# Altium PCB AT89S52单片机入门与提高.PcbDoc (part 2 of 4)
Units mm, origin at the board's own origin, x right, y up, seen from the top; angles counter-clockwise.
Board outline 152.4 x 101.6 mm, 2 copper layers (Top Layer, Bottom Layer); 111 components, 112 nets, 451 pads, 53 vias.
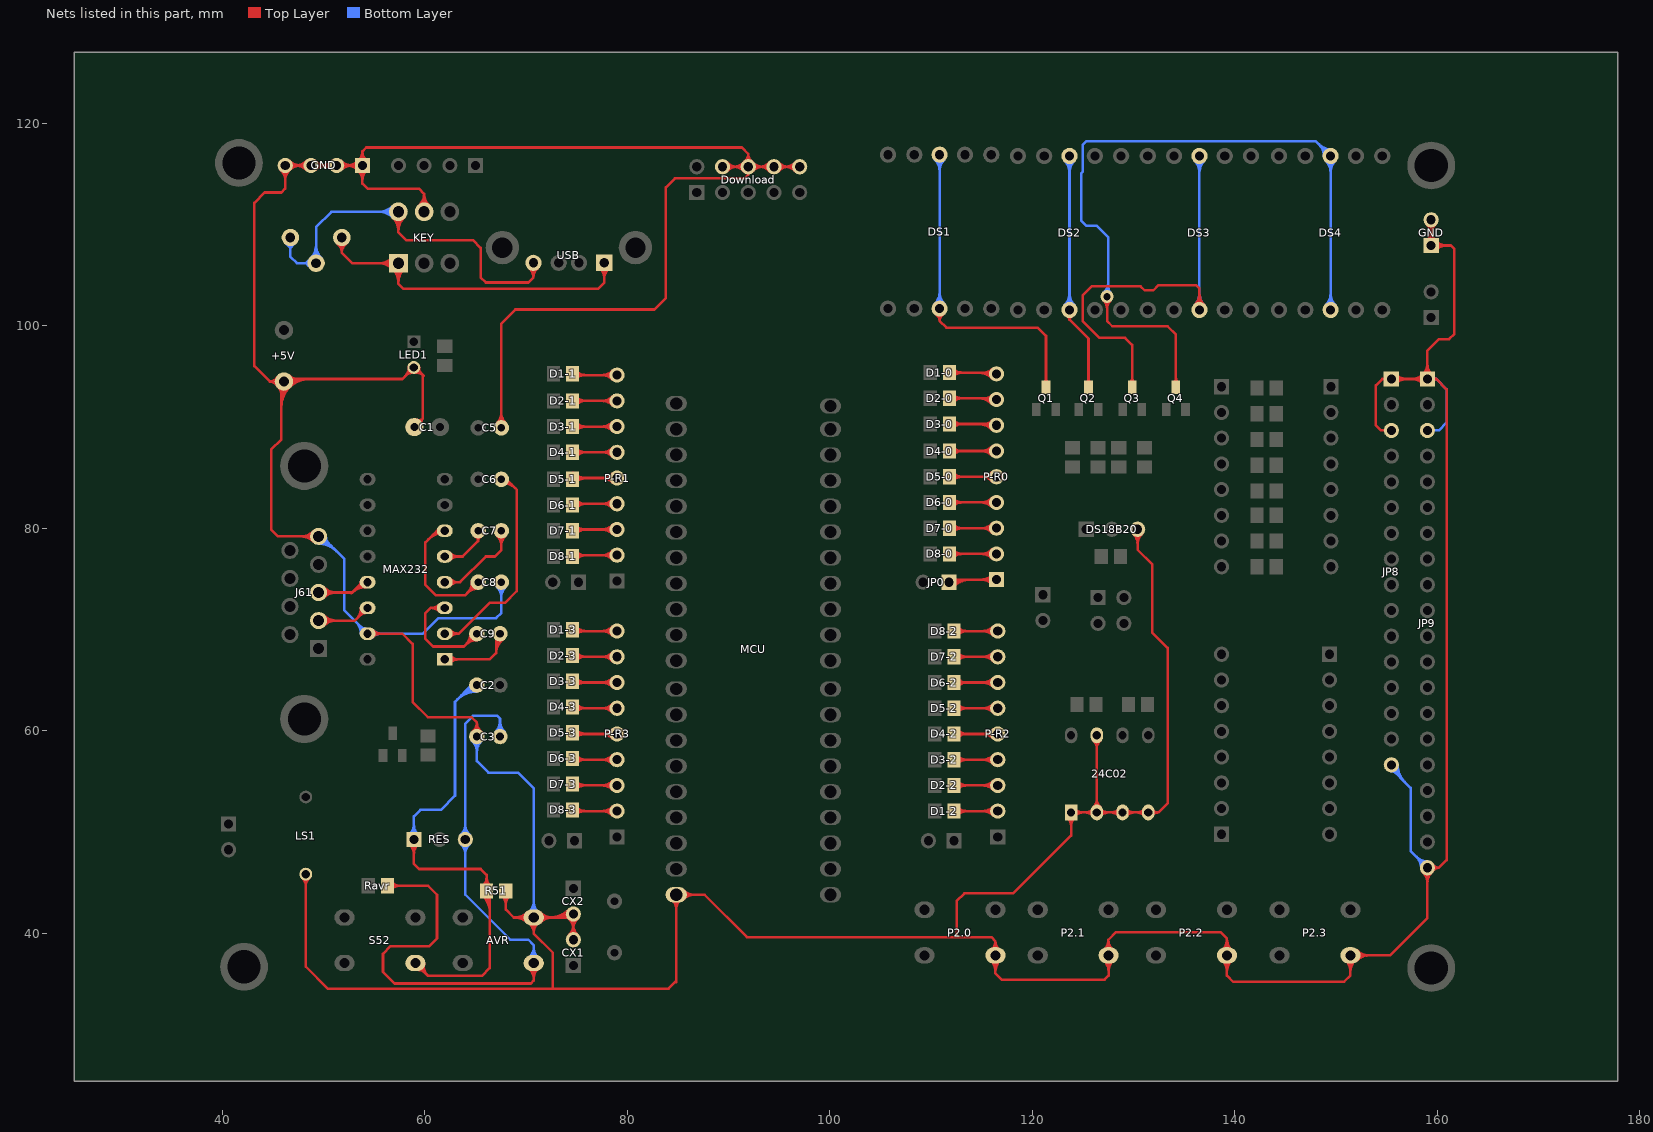
[diagram p2: the nets of this part, all layers, seen from the top]

## Via types
v1: diameter 1.27, hole 0.711, Top Layer to Bottom Layer, 53 vias

## Nets (pads, with @x,y where several pads share a name; then routed paths per layer and width w, separated by ;. In a path a pad name is that pad's centre, name@x,y a point inside that pad or via, vN(x,y) a via of type N, cw(c..) or ccw(c..) an arc to the next point about the centre after c; other vN are vias at no path point) (continued)
GND: 24C02.1 24C02.2 24C02.3 24C02.4 24C02.7 +5V.2@46.101,94.488 AVR.2 C1.2 C3.2 C5.2 C8.1 CX1.2 CX2.2 Download.4 Download.6 Download.8 Download.10 DS18B20.3 GND.1 GND.2 GND.3 GND.4 J61.5 JP8.1 JP8.3 JP8.16 JP9.1 JP9.3 JP9.20 KEY.3 LED1.2 LS1.2 MAX232.15 MCU.20 P2.0.1@116.355,37.831 P2.1.1 P2.2.1 P2.3.1 R51.2 | length 834.9
  Top Layer w0.254: +5V.2@45.43,94.08 ccw(c44.704,93.638) 44.704,94.488 ; +5V.2@45.43,94.896 cw(c44.704,95.338) 44.704,94.488 ; +5V.2@45.546,93.933 cw(c44.819,93.206) 45.847,93.206 cw(c47.383,93.206) 46.297,94.292 cw(c47.383,93.206) 47.383,94.742 cw(c47.383,95.77) +5V.2@46.656,95.043 ; +5V.2@45.647,94.212 ccw(c45.156,93.913) 45.156,94.488 ccw(c45.156,95.063) +5V.2@45.647,94.764 ; GND.4@45.787,115.383 cw(c44.724,114.32) 46.228,114.32 cw(c47.732,114.32) 46.669,115.383 cw(c47.732,114.32) 47.732,115.824 cw(c47.732,117.328) GND.4@46.669,116.265 ; 45.847,91.98 cw(c48.609,91.98) 46.656,93.933 cw(c48.609,91.98) 48.609,94.742 ; 45.847,92.593 cw(c47.996,92.593) 46.476,94.113 cw(c47.996,92.593) 47.996,94.742 ; GND.4@45.967,115.563 cw(c45.337,114.933) 46.228,114.933 cw(c47.119,114.933) 46.489,115.563 cw(c47.119,114.933) 47.119,115.824 cw(c47.119,116.715) GND.4@46.489,116.085 ; +5V.2@46.101,94.742 57.785,94.742 LED1.2@58.928,95.885 59.055,95.885 59.817,95.123 59.817,90.83 ; LS1.2@47.901,45.488 cw(c47.034,44.621) 48.26,44.621 cw(c49.486,44.621) LS1.2@48.619,45.488 ; LS1.2@48.26,45.847 48.26,36.703 50.419,34.544 84.074,34.544 84.836,35.306 ; GND.3@48.327,115.383 ccw(c47.264,114.32) 47.264,115.824 ccw(c47.264,117.328) GND.3@48.327,116.265 ; GND.3@48.507,115.563 ccw(c47.877,114.933) 47.877,115.824 ccw(c47.877,116.715) GND.3@48.507,116.085 ; J61.5@49.02,78.692 ccw(c47.795,77.467) 47.795,79.2 ccw(c47.795,80.933) J61.5@49.02,79.708 ; GND.3@49.029,115.563 cw(c49.659,114.933) 49.659,115.824 cw(c49.659,116.715) GND.3@49.029,116.085 ; J61.5@49.2,78.872 ccw(c48.408,78.08) 48.408,79.2 ccw(c48.408,80.32) J61.5@49.2,79.528 ; GND.3@49.209,115.383 cw(c50.272,114.32) 50.272,115.824 cw(c50.272,117.328) GND.3@49.209,116.265 ; J61.5@49.528,79.2 45.514,79.2 44.831,79.883 44.831,87.757 45.847,88.773 45.847,94.234 +5V.2@46.101,94.488 44.704,94.488 ; GND.2@50.867,115.383 ccw(c49.804,114.32) 49.804,115.824 ccw(c49.804,117.328) GND.2@50.867,116.265 ; GND.2@51.047,115.563 ccw(c50.417,114.933) 50.417,115.824 ccw(c50.417,116.715) GND.2@51.047,116.085 ; GND.2@51.569,115.563 cw(c52.199,114.933) 52.199,115.824 cw(c52.199,116.715) GND.2@51.569,116.085 ; GND.2@51.749,115.383 cw(c52.812,114.32) 52.812,115.824 cw(c52.812,117.328) GND.2@51.749,116.265 ; GND.1@53.407,116.265 cw(c52.344,117.328) 52.344,115.824 cw(c52.344,114.32) 53.407,115.383 cw(c52.344,114.32) 53.848,114.32 cw(c55.352,114.32) GND.1@54.289,115.383 ; GND.1@53.432,116.288 ccw(c52.593,117.221) 53.848,117.221 ; GND.1@53.587,116.085 cw(c52.957,116.715) 52.957,115.824 cw(c52.957,114.933) 53.587,115.563 cw(c52.957,114.933) 53.848,114.933 cw(c54.739,114.933) GND.1@54.109,115.563 ; GND.1@53.601,116.099 ccw(c53.105,116.651) 53.848,116.651 ccw(c54.591,116.651) GND.1@54.095,116.099 ; GND.1@53.848,115.824 GND.4@46.228,115.824 46.228,113.538 45.847,113.157 44.196,113.157 43.18,112.141 43.18,96.012 44.704,94.488 ; GND.1@54.264,116.288 cw(c55.103,117.221) 53.848,117.221 ; MAX232.15@54.36,69.597 57.784,69.597 58.801,68.58 58.801,62.865 60.325,61.341 64.643,61.341 65.151,60.833 ; MAX232.15@54.874,69.245 cw(c55.724,68.395) 55.724,69.597 cw(c55.724,70.799) MAX232.15@54.874,69.949 ; LED1.2@58.42,95.885 cw(c57.194,95.885) 58.061,95.018 cw(c58.928,94.151) LED1.2@58.928,95.377 ; LED1.2@58.954,95.632 cw(c59.023,94.958) 59.503,95.437 ; C1.2@58.979,89.992 59.817,90.83 ; LED1.2@58.98,95.38 cw(c59.094,94.273) 59.88,95.06 ; C1.2@59.259,90.713 ccw(c59.448,91.2) 59.817,90.83 ; KEY.3@59.414,111.848 ccw(c58.362,113.03) 59.944,113.03 ; LED1.2@59.436,95.885 ccw(c60.356,95.885) 59.705,95.235 ; KEY.3@59.582,111.658 ccw(c58.866,112.464) 59.944,112.464 ccw(c61.022,112.464) KEY.3@60.306,111.658 ; C1.2@59.699,90.272 cw(c60.186,90.461) 59.817,90.83 ; KEY.3@59.944,111.252 59.944,113.03 ; KEY.3@60.474,111.848 cw(c61.526,113.03) 59.944,113.03 ; C3.2@64.733,59.914 ccw(c63.932,60.833) 65.151,60.833 ; C3.2@64.9,59.723 ccw(c64.42,60.274) 65.151,60.274 ccw(c65.882,60.274) C3.2@65.402,59.723 ; C3.2@65.151,59.436 65.151,60.833 ; C3.2@65.569,59.914 cw(c66.37,60.833) 65.151,60.833 ; C5.2@67.115,90.365 ccw(c66.031,91.449) 67.564,91.449 ccw(c69.097,91.449) C5.2@68.013,90.365 ; C5.2@67.295,90.185 ccw(c66.644,90.836) 67.564,90.836 ccw(c68.484,90.836) C5.2@67.833,90.185 ; C5.2@67.564,89.916 67.564,100.203 68.961,101.6 82.677,101.6 83.82,102.743 83.82,113.665 84.709,114.554 91.567,114.554 91.948,114.935 ; R51.2@67.636,43.726 cw(c66.743,42.833) 68.006,42.833 cw(c69.269,42.833) R51.2@68.376,43.726 ; R51.2@68.006,44.196 68.006,42.357 68.794,41.569 74.335,41.569 CX2.2@74.676,41.91 CX1.2@74.676,39.37 ; AVR.2@70.086,41.093 ccw(c68.937,39.944) 68.937,41.569 ccw(c68.937,43.194) AVR.2@70.086,42.045 ; AVR.2@70.266,41.273 ccw(c69.55,40.558) 69.55,41.569 ccw(c69.55,42.581) AVR.2@70.266,41.865 ; AVR.2@70.294,41.085 cw(c69.227,39.982) 70.762,39.982 ; AVR.2@70.471,41.268 cw(c69.806,40.581) 70.762,40.581 cw(c71.718,40.581) AVR.2@71.053,41.268 ; AVR.2@70.762,41.569 70.762,39.982 ; AVR.2@71.23,41.085 ccw(c72.297,39.982) 70.762,39.982 ; AVR.2@71.258,41.273 cw(c71.974,40.558) 71.974,41.569 cw(c71.974,42.581) AVR.2@71.258,41.865 ; AVR.2@71.438,41.093 cw(c72.587,39.944) 72.587,41.569 cw(c72.587,43.194) AVR.2@71.438,42.045 ; 72.349,41.569 ccw(c72.349,44.237) CX2.2@74.235,42.351 ; 72.644,34.544 72.644,38.1 70.762,39.982 ; 72.962,41.569 ccw(c72.962,43.624) CX2.2@74.415,42.171 ; 73.576,41.569 ccw(c73.576,43.01) CX2.2@74.595,41.991 ; 73.995,41.569 cw(c73.995,41.229) 74.235,41.469 cw(c73.172,40.406) 74.676,40.406 cw(c76.18,40.406) CX2.2@75.117,41.469 ; CX1.2@74.235,39.811 ccw(c73.172,40.874) 74.676,40.874 ccw(c76.18,40.874) CX1.2@75.117,39.811 ; CX1.2@74.415,39.631 ccw(c73.785,40.261) 74.676,40.261 ccw(c75.567,40.261) CX1.2@74.937,39.631 ; CX2.2@74.415,41.649 cw(c73.785,41.019) 74.676,41.019 cw(c75.567,41.019) CX2.2@74.937,41.649 ; MCU.20@84.394,43.373 cw(c83.326,42.305) 84.836,42.305 cw(c86.346,42.305) MCU.20@85.278,43.373 ; MCU.20@84.573,43.552 cw(c83.939,42.918) 84.836,42.918 cw(c85.733,42.918) MCU.20@85.099,43.552 ; 84.836,35.179 MCU.20@84.836,43.815 87.63,43.815 91.821,39.624 115.951,39.624 116.355,39.22 ; MCU.20@85.399,43.552 cw(c86.033,42.918) 86.033,43.815 cw(c86.033,44.712) MCU.20@85.399,44.078 ; MCU.20@85.578,43.373 cw(c86.646,42.305) 86.646,43.815 cw(c86.646,45.325) MCU.20@85.578,44.257 ; Download.4@89.408,115.697 Download.10@97.028,115.697 ; Download.4@89.669,115.436 cw(c90.299,114.806) 90.299,115.697 cw(c90.299,116.588) Download.4@89.669,115.958 ; Download.4@89.849,115.256 cw(c90.912,114.193) 90.912,115.697 cw(c90.912,117.201) Download.4@89.849,116.138 ; Download.6@91.507,115.256 ccw(c90.444,114.193) 90.444,115.697 ccw(c90.444,117.201) Download.6@91.507,116.138 ; Download.6@91.567,116.19 ccw(c90.965,116.967) 91.948,116.967 ; Download.6@91.687,115.436 ccw(c91.057,114.806) 91.057,115.697 ccw(c91.057,116.588) Download.6@91.687,115.958 ; Download.6@91.722,115.989 ccw(c91.366,116.449) 91.948,116.449 ccw(c92.53,116.449) Download.6@92.174,115.989 ; Download.6@91.824,115.086 cw(c91.794,114.935) 91.948,114.935 ; Download.6@92.072,115.086 ccw(c92.102,114.935) 91.948,114.935 ; Download.6@92.209,115.436 cw(c92.839,114.806) 92.839,115.697 cw(c92.839,116.588) Download.6@92.209,115.958 ; Download.6@92.329,116.19 cw(c92.931,116.967) 91.948,116.967 ; Download.6@92.389,115.256 cw(c93.452,114.193) 93.452,115.697 cw(c93.452,117.201) Download.6@92.389,116.138 ; Download.8@94.047,115.256 ccw(c92.984,114.193) 92.984,115.697 ccw(c92.984,117.201) Download.8@94.047,116.138 ; Download.8@94.227,115.436 ccw(c93.597,114.806) 93.597,115.697 ccw(c93.597,116.588) Download.8@94.227,115.958 ; Download.8@94.749,115.436 cw(c95.379,114.806) 95.379,115.697 cw(c95.379,116.588) Download.8@94.749,115.958 ; Download.8@94.929,115.256 cw(c95.992,114.193) 95.992,115.697 cw(c95.992,117.201) Download.8@94.929,116.138 ; Download.10@96.587,115.256 ccw(c95.524,114.193) 95.524,115.697 ccw(c95.524,117.201) Download.10@96.587,116.138 ; Download.10@96.767,115.436 ccw(c96.137,114.806) 96.137,115.697 ccw(c96.137,116.588) Download.10@96.767,115.958 ; 112.522,39.624 112.522,43.18 113.284,43.942 118.11,43.942 123.826,49.658 24C02.1@123.826,51.939 132.457,51.939 ; P2.0.1@115.879,37.355 cw(c114.73,36.206) 116.355,36.206 cw(c117.98,36.206) P2.0.1@116.831,37.355 ; P2.0.1@115.938,38.359 ccw(c115.259,39.22) 116.355,39.22 ; P2.0.1@116.059,37.535 cw(c115.343,36.82) 116.355,36.82 cw(c117.367,36.82) P2.0.1@116.651,37.535 ; P2.0.1@116.095,38.16 ccw(c115.673,38.696) 116.355,38.696 ccw(c117.038,38.696) P2.0.1@116.615,38.16 ; P2.0.1@116.355,37.831 P2.0.1@116.952,37.831 ; P2.0.1@116.772,38.359 cw(c117.451,39.22) 116.355,39.22 ; 24C02.1@123.485,51.42 cw(c122.661,50.596) 123.826,50.596 cw(c124.991,50.596) 24C02.1@124.167,51.42 ; 24C02.1@124.167,51.598 cw(c124.991,50.774) 124.991,51.939 cw(c124.991,53.104) 24C02.1@124.167,52.28 ; 24C02.2@126.025,51.598 ccw(c125.201,50.774) 125.201,51.939 ccw(c125.201,53.104) 24C02.2@126.025,52.28 ; 24C02.2@126.025,52.458 ccw(c125.201,53.282) 126.366,53.282 ccw(c127.531,53.282) 24C02.2@126.707,52.458 ; 24C02.7@126.025,59.04 cw(c125.201,58.216) 126.366,58.216 cw(c127.531,58.216) 24C02.7@126.707,59.04 ; 24C02.2@126.366,51.939 24C02.7@126.366,59.559 ; 24C02.2@126.707,51.598 cw(c127.531,50.774) 127.531,51.939 cw(c127.531,53.104) 24C02.2@126.707,52.28 ; P2.1.1@127.055,37.355 cw(c125.906,36.206) 127.531,36.206 cw(c129.156,36.206) P2.1.1@128.007,37.355 ; P2.1.1@127.062,38.314 ccw(c126.035,39.37) 127.508,39.37 ; P2.1.1@127.235,37.535 cw(c126.519,36.82) 127.531,36.82 cw(c128.543,36.82) P2.1.1@127.827,37.535 ; P2.1.1@127.239,38.132 ccw(c126.619,38.769) 127.508,38.769 ; 127.508,38.808 ccw(c128.39,38.808) P2.1.1@127.808,38.146 ; P2.1.1@127.975,38.337 cw(c128.884,39.37) 127.508,39.37 ; 24C02.3@128.565,51.598 ccw(c127.741,50.774) 127.741,51.939 ccw(c127.741,53.104) 24C02.3@128.565,52.28 ; 24C02.3@129.247,51.598 cw(c130.071,50.774) 130.071,51.939 cw(c130.071,53.104) 24C02.3@129.247,52.28 ; DS18B20.3@129.958,79.464 cw(c128.895,78.401) 130.399,78.401 cw(c131.903,78.401) DS18B20.3@130.84,79.464 ; DS18B20.3@130.138,79.644 cw(c129.508,79.014) 130.399,79.014 cw(c131.29,79.014) DS18B20.3@130.66,79.644 ; DS18B20.3@130.399,79.905 130.399,77.881 131.826,76.454 131.826,69.723 133.35,68.199 133.35,52.832 132.457,51.939 ; 24C02.4@131.105,51.598 ccw(c130.281,50.774) 130.281,51.939 ccw(c130.281,53.104) 24C02.4@131.105,52.28 ; 24C02.4@131.821,51.636 cw(c132.457,51.121) 132.457,51.939 ; 24C02.4@131.821,52.243 ccw(c132.457,52.757) 132.457,51.939 ; P2.2.1@138.739,37.355 cw(c137.59,36.206) 139.215,36.206 cw(c140.84,36.206) P2.2.1@139.691,37.355 ; P2.2.1@138.739,38.307 ccw(c137.59,39.456) 139.215,39.456 ccw(c140.84,39.456) P2.2.1@139.691,38.307 ; P2.2.1@138.919,37.535 cw(c138.203,36.82) 139.215,36.82 cw(c140.227,36.82) P2.2.1@139.511,37.535 ; P2.2.1@138.919,38.127 ccw(c138.203,38.843) 139.215,38.843 ccw(c140.227,38.843) P2.2.1@139.511,38.127 ; P2.3.1@150.931,37.355 cw(c149.782,36.206) 151.407,36.206 cw(c153.032,36.206) P2.3.1@151.883,37.355 ; P2.3.1@151.111,37.535 cw(c150.395,36.82) 151.407,36.82 cw(c152.419,36.82) P2.3.1@151.703,37.535 ; P2.3.1@151.549,37.973 P2.3.1@151.407,37.831 ; P2.3.1@151.903,37.535 cw(c152.619,36.82) 152.619,37.831 cw(c152.619,38.843) P2.3.1@151.903,38.127 ; P2.3.1@152.083,37.355 cw(c153.232,36.206) 153.232,37.831 cw(c153.232,39.456) P2.3.1@152.083,38.307 ; JP8.3@155.448,89.662 154.432,89.662 153.924,90.17 153.924,94.107 154.559,94.742 159.893,94.742 ; JP8.1@155.709,94.481 cw(c156.339,93.851) 156.339,94.742 cw(c156.339,95.633) JP8.1@155.709,95.003 ; JP8.1@155.889,94.301 cw(c156.952,93.238) 156.952,94.742 cw(c156.952,96.246) JP8.1@155.889,95.183 ; JP9.20@158.563,46.041 cw(c157.5,44.978) 159.004,44.978 cw(c160.508,44.978) JP9.20@159.445,46.041 ; JP9.1@158.563,94.301 ccw(c157.5,93.238) 157.5,94.742 ccw(c157.5,96.246) 158.563,95.183 ccw(c157.5,96.246) 159.004,96.246 ccw(c160.508,96.246) JP9.1@159.445,95.183 ; JP9.20@158.743,46.221 cw(c158.113,45.591) 159.004,45.591 cw(c159.895,45.591) JP9.20@159.265,46.221 ; JP9.1@158.743,94.481 ccw(c158.113,93.851) 158.113,94.742 ccw(c158.113,95.633) 158.743,95.003 ccw(c158.113,95.633) 159.004,95.633 ccw(c159.895,95.633) JP9.1@159.265,95.003 ; GND.1@158.939,108.361 ccw(c157.876,109.424) 159.38,109.424 ccw(c160.884,109.424) 159.821,108.361 ccw(c160.884,109.424) 160.884,107.92 ccw(c160.884,106.416) GND.1@159.821,107.479 ; GND.2@158.939,110.019 cw(c157.876,108.956) 159.38,108.956 cw(c160.884,108.956) GND.2@159.821,110.019 ; JP9.1@159.004,94.742 159.004,97.536 160.147,98.679 161.163,98.679 161.671,99.187 161.671,107.569 161.32,107.92 GND.1@159.38,107.92 GND.2@159.38,110.46 ; GND.1@159.119,108.181 ccw(c158.489,108.811) 159.38,108.811 ccw(c160.271,108.811) 159.641,108.181 ccw(c160.271,108.811) 160.271,107.92 ccw(c160.271,107.029) GND.1@159.641,107.659 ; GND.2@159.119,110.199 cw(c158.489,109.569) 159.38,109.569 cw(c160.271,109.569) GND.2@159.641,110.199 ; JP9.20@159.528,46.144 cw(c160.147,45.745) 160.147,46.482 ; JP9.20@159.528,46.82 ccw(c160.147,47.219) 160.147,46.482 ; JP9.1@159.59,94.529 cw(c159.893,94.419) 159.893,94.742 ; JP9.1@159.59,94.955 ccw(c159.893,95.065) 159.893,94.742 ; 53.848,117.221 53.848,114.046 54.356,113.538 59.436,113.538 59.944,113.03 ; 53.848,117.221 54.229,117.602 91.313,117.602 91.948,116.967 ; 91.948,114.935 91.948,116.967 ; 116.355,39.22 116.355,36.045 116.967,35.433 127.127,35.433 127.531,35.837 P2.1.1@127.531,37.831 127.508,37.854 127.508,39.37 ; 127.508,39.37 128.27,40.132 138.557,40.132 139.215,39.474 139.215,35.837 139.827,35.225 150.795,35.225 151.407,35.837 P2.3.1@151.407,37.831 ; P2.3.1@151.407,37.831 155.306,37.831 159.004,41.529 JP9.20@159.004,46.482 160.147,46.482 ; 159.893,94.742 160.909,93.726 160.909,47.244 160.147,46.482
  Bottom Layer w0.254: J61.5@49.528,78.482 cw(c49.528,76.015) 51.273,77.759 ; J61.5@49.528,78.736 cw(c49.528,76.882) 50.839,78.193 ; J61.5@49.528,78.99 cw(c49.528,77.749) 50.405,78.627 ; J61.5@49.528,79.2 49.832,79.2 52.07,76.962 52.07,71.887 MAX232.15@54.36,69.597 59.818,69.597 61.341,71.12 67.056,71.12 67.564,71.628 C8.1@67.564,74.676 ; J61.5@50.246,79.2 ccw(c51.246,79.2) 50.539,78.493 ; 53.232,70.724 cw(c52.105,69.597) MAX232.15@53.699,69.597 ; 53.624,70.332 ccw(c54.197,70.905) MAX232.15@54.197,70.095 ; 53.666,70.291 cw(c52.972,69.597) MAX232.15@53.953,69.597 ; MAX232.15@54.874,69.245 cw(c55.724,68.395) 55.724,69.597 cw(c55.724,70.799) MAX232.15@54.874,69.949 ; C3.2@64.702,58.987 cw(c63.618,57.903) 65.151,57.903 cw(c66.684,57.903) C3.2@65.6,58.987 ; C3.2@64.882,59.167 cw(c64.231,58.516) 65.151,58.516 cw(c66.071,58.516) C3.2@65.42,59.167 ; C3.2@65.151,59.436 65.151,57.023 66.294,55.88 69.215,55.88 70.762,54.333 AVR.2@70.762,41.569 ; C8.1@67.115,74.227 cw(c66.031,73.143) 67.564,73.143 cw(c69.097,73.143) C8.1@68.013,74.227 ; C8.1@67.295,74.407 cw(c66.644,73.756) 67.564,73.756 cw(c68.484,73.756) C8.1@67.833,74.407 ; AVR.2@70.286,42.045 ccw(c69.137,43.194) 70.762,43.194 ccw(c72.387,43.194) AVR.2@71.238,42.045 ; AVR.2@70.466,41.865 ccw(c69.75,42.581) 70.762,42.581 ccw(c71.774,42.581) AVR.2@71.058,41.865 ; JP8.16@155.448,56.019 cw(c155.448,55.435) 155.861,55.848 ; JP8.16@155.448,56.642 155.448,56.261 157.353,54.356 157.353,48.133 JP9.20@159.004,46.482 ; JP8.16@155.563,56.642 ccw(c156.76,56.642) 155.914,55.795 ; JP8.16@155.817,56.642 ccw(c157.628,56.642) 156.347,55.362 ; JP8.16@156.071,56.642 ccw(c158.495,56.642) 156.781,54.928 ; JP9.20@158.381,46.482 ccw(c156.877,46.482) 157.94,47.546 ccw(c159.004,48.609) JP9.20@159.004,47.105 ; JP9.20@158.635,46.482 ccw(c157.744,46.482) 158.374,47.112 ccw(c159.004,47.742) JP9.20@159.004,46.851 ; JP9.3@159.004,89.662 160.147,89.662 160.909,90.424 160.909,93.726 159.893,94.742 JP9.1@159.004,94.742
NetAVR_1: AVR.1 C3.1 Ravr.1 RES.3 | length 89.4
  Top Layer w0.254: Ravr.1@56.322,44.704 60.325,44.704 61.214,43.815 61.214,39.497 60.452,38.735 56.642,38.735 55.88,37.973 55.88,36.195 57.023,35.052 70.485,35.052 70.762,35.329 AVR.1@70.762,37.069 AVR.1@70.627,37.069 ; Ravr.1@56.692,44.334 cw(c57.585,43.441) 57.585,44.704 cw(c57.585,45.967) Ravr.1@56.692,45.074 ; AVR.1@70.286,36.593 cw(c69.137,35.444) 70.762,35.444 cw(c72.387,35.444) AVR.1@71.238,36.593 ; AVR.1@70.466,36.773 cw(c69.75,36.058) 70.762,36.058 cw(c71.774,36.058) AVR.1@71.058,36.773
  Bottom Layer w0.254: RES.3@63.567,48.835 cw(c62.504,47.772) 64.008,47.772 cw(c65.512,47.772) RES.3@64.449,48.835 ; RES.3@63.567,49.717 ccw(c62.504,50.78) 64.008,50.78 ccw(c65.512,50.78) RES.3@64.449,49.717 ; RES.3@63.747,49.015 cw(c63.117,48.385) 64.008,48.385 cw(c64.899,48.385) RES.3@64.269,49.015 ; RES.3@63.747,49.537 ccw(c63.117,50.167) 64.008,50.167 ccw(c64.899,50.167) RES.3@64.269,49.537 ; C3.1@66.988,59.885 ccw(c65.904,60.969) 67.437,60.969 ccw(c68.97,60.969) C3.1@67.886,59.885 ; C3.1@67.168,59.705 ccw(c66.517,60.356) 67.437,60.356 ccw(c68.357,60.356) C3.1@67.706,59.705 ; C3.1@67.437,59.436 67.437,61.214 67.183,61.468 64.77,61.468 64.008,60.706 64.008,43.815 68.453,39.37 70.231,39.37 70.762,38.839 AVR.1@70.762,37.069 ; AVR.1@70.286,37.545 ccw(c69.137,38.694) 70.762,38.694 ccw(c72.387,38.694) AVR.1@71.238,37.545 ; AVR.1@70.466,37.365 ccw(c69.75,38.081) 70.762,38.081 ccw(c71.774,38.081) AVR.1@71.058,37.365
NetC2_2: C2.2 R51.1 RES.1 S52.1 | length 68.3
  Top Layer w0.254: RES.1@58.487,48.835 cw(c57.424,47.772) 58.928,47.772 cw(c60.432,47.772) RES.1@59.369,48.835 ; RES.1@58.667,49.015 cw(c58.037,48.385) 58.928,48.385 cw(c59.819,48.385) RES.1@59.189,49.015 ; RES.1@58.928,49.276 58.928,46.863 59.436,46.355 65.532,46.355 66.106,45.781 R51.1@66.106,44.196 66.421,43.881 66.421,36.576 65.659,35.814 60.333,35.814 S52.1@59.078,37.069 ; S52.1@59.278,36.396 cw(c59.278,35.254) 60.085,36.062 ; S52.1@59.687,36.98 ccw(c60.471,36.81) 59.904,36.243 ; S52.1@59.936,36.926 ccw(c61.012,36.693) 60.233,35.914 ; R51.1@65.736,43.726 cw(c64.083,42.073) 66.421,42.073 ; R51.1@65.736,44.666 ccw(c64.843,45.559) 66.106,45.559 ccw(c67.369,45.559) R51.1@66.476,44.666 ; R51.1@65.916,43.906 cw(c64.696,42.686) 66.421,42.686 ; R51.1@66.095,44.085 cw(c65.309,43.299) 66.421,43.299
  Bottom Layer w0.254: RES.1@58.487,49.717 ccw(c57.424,50.78) 58.928,50.78 ccw(c60.432,50.78) RES.1@59.369,49.717 ; RES.1@58.667,49.537 ccw(c58.037,50.167) 58.928,50.167 ccw(c59.819,50.167) RES.1@59.189,49.537 ; RES.1@58.928,49.276 58.928,51.562 59.563,52.197 61.595,52.197 62.992,53.594 62.992,62.865 64.643,64.516 C2.2@65.151,64.516 ; 63.2,63.073 cw(c65.151,61.122) C2.2@65.151,63.881 ; 63.633,63.506 cw(c65.151,61.989) C2.2@65.151,64.135 ; 64.067,63.94 cw(c65.151,62.856) C2.2@65.151,64.389
NetC6_1: C6.1 MAX232.2 | length 25.3
  Top Layer w0.254: MAX232.2@61.98,69.597 63.374,69.597 66.421,72.644 67.945,72.644 69.088,73.787 69.088,83.82 68.072,84.836 C6.1@67.564,84.836 ; MAX232.2@62.494,69.245 cw(c63.344,68.395) 63.344,69.597 cw(c63.344,70.799) MAX232.2@62.494,69.949 ; C6.1@67.574,84.709 cw(c67.673,83.455) 68.563,84.345 ; C6.1@67.594,84.456 cw(c67.731,82.733) 68.953,83.955
NetC7_1: C7.1 MAX232.4 | length 14.5
  Top Layer w0.254: MAX232.4@61.98,74.677 63.501,74.677 66.04,77.216 66.929,77.216 67.564,77.851 C7.1@67.564,79.756 ; MAX232.4@62.494,74.325 cw(c63.344,73.475) 63.344,74.677 cw(c63.344,75.879) MAX232.4@62.494,75.029 ; C7.1@67.115,79.307 cw(c66.031,78.223) 67.564,78.223 cw(c69.097,78.223) C7.1@68.013,79.307 ; C7.1@67.295,79.487 cw(c66.644,78.836) 67.564,78.836 cw(c68.484,78.836) C7.1@67.833,79.487
NetC7_2: C7.2 MAX232.5 | length 7.9
  Top Layer w0.254: MAX232.5@61.98,77.217 63.755,77.217 65.278,78.74 ; MAX232.5@62.494,76.865 cw(c63.344,76.015) 63.344,77.217 cw(c63.344,78.419) MAX232.5@62.494,77.569 ; C7.2@65,79.185 cw(c64.783,78.74) 65.278,78.74 ; C7.2@65.278,79.756 65.278,78.74 ; C7.2@65.556,79.185 ccw(c65.773,78.74) 65.278,78.74
NetC8_2: C8.2 MAX232.6 | length 19.3
  Top Layer w0.254: 60.372,78.914 cw(c61.817,77.469) MAX232.6@61.817,79.513 ; 60.806,79.348 cw(c61.817,78.337) MAX232.6@61.817,79.767 ; MAX232.6@61.98,79.757 61.215,79.757 60.071,78.613 60.071,74.422 61.087,73.406 64.008,73.406 C8.2@65.278,74.676 ; C8.2@64.643,74.676 cw(c63.11,74.676) 64.194,73.592 cw(c65.278,72.508) C8.2@65.278,74.041 ; C8.2@64.897,74.676 cw(c63.977,74.676) 64.628,74.026 cw(c65.278,73.375) C8.2@65.278,74.295
NetC9_1: C9.1 MAX232.1 | length 13.3
  Top Layer w0.254: MAX232.1@61.98,67.057 66.42,67.057 67.054,67.691 67.054,69.213 C9.1@67.437,69.596 ; MAX232.1@62.494,66.705 cw(c63.344,65.855) 63.344,67.057 cw(c63.344,68.259) MAX232.1@62.494,67.409 ; 67.054,67.653 cw(c68.782,67.653) C9.1@67.799,69.074 ; 67.054,68.138 cw(c68.447,68.138) C9.1@67.654,69.283 ; 67.054,68.623 cw(c68.111,68.623) C9.1@67.509,69.492
NetC9_2: C9.2 MAX232.3 | length 16.3
  Top Layer w0.254: MAX232.3@61.465,71.785 ccw(c60.615,70.935) 60.615,72.137 ccw(c60.615,73.339) MAX232.3@61.465,72.489 ; MAX232.3@61.98,72.137 60.58,72.137 60.071,71.628 60.071,69.088 60.833,68.326 63.881,68.326 C9.2@65.151,69.596 ; C9.2@64.516,69.596 cw(c62.983,69.596) 64.067,68.512 cw(c65.151,67.428) C9.2@65.151,68.961 ; C9.2@64.77,69.596 cw(c63.85,69.596) 64.501,68.946 cw(c65.151,68.295) C9.2@65.151,69.215
NetD1-0_1: D1-0.1 P-R0.1 | length 9.9
  Top Layer w0.254: D1-0.1@111.821,95.377 P-R0.1@116.332,95.377 ; D1-0.1@112.191,95.007 cw(c113.084,94.114) 113.084,95.377 cw(c113.084,96.64) D1-0.1@112.191,95.747 ; 114.648,95.377 cw(c114.648,93.439) P-R0.1@116.018,94.809 ; P-R0.1@116.018,95.691 cw(c115.262,96.447) 115.262,95.377 cw(c115.262,94.053) P-R0.1@116.198,94.989
NetD1-1_1: D1-1.1 P-R1.1 | length 10.8
  Top Layer w0.254: D1-1.1@74.61,95.25 74.737,95.123 P-R1.1@78.994,95.123 ; D1-1.1@74.8,95.34 ccw(c75.325,95.865) 75.325,95.123 ; D1-1.1@74.98,94.78 cw(c75.807,93.953) 75.807,95.123 ; D1-1.1@74.98,95.52 ccw(c75.938,96.478) 75.938,95.123 ; P-R1.1@78.553,94.682 ccw(c77.49,93.619) 77.49,95.123 ccw(c77.49,96.627) P-R1.1@78.553,95.564 ; P-R1.1@78.733,94.862 ccw(c78.103,94.232) 78.103,95.123 ccw(c78.103,96.014) P-R1.1@78.733,95.384
NetD1-2_1: D1-2.1 P-R2.2 | length 10.1
  Top Layer w0.254: D1-2.1@112.268,52.07 P-R2.2@116.586,52.07 ; D1-2.1@112.638,51.7 cw(c113.531,50.807) 113.531,52.07 cw(c113.531,53.333) D1-2.1@112.638,52.44 ; P-R2.2@116.145,51.629 ccw(c115.082,50.566) 115.082,52.07 ccw(c115.082,53.574) P-R2.2@116.145,52.511 ; P-R2.2@116.325,51.809 ccw(c115.695,51.179) 115.695,52.07 ccw(c115.695,52.961) P-R2.2@116.325,52.331
NetD1-3_1: D1-3.1 P-R3.1 | length 10.8
  Top Layer w0.254: D1-3.1@74.61,69.977 74.737,69.85 P-R3.1@78.994,69.85 ; D1-3.1@74.8,70.067 ccw(c75.325,70.592) 75.325,69.85 ; D1-3.1@74.98,69.507 cw(c75.807,68.68) 75.807,69.85 ; D1-3.1@74.98,70.247 ccw(c75.938,71.205) 75.938,69.85 ; P-R3.1@78.553,69.409 ccw(c77.49,68.346) 77.49,69.85 ccw(c77.49,71.354) P-R3.1@78.553,70.291 ; P-R3.1@78.733,69.589 ccw(c78.103,68.959) 78.103,69.85 ccw(c78.103,70.741) P-R3.1@78.733,70.111
NetD2-0_1: D2-0.1 P-R0.2 | length 9.9
  Top Layer w0.254: D2-0.1@111.821,92.837 P-R0.2@116.332,92.837 ; D2-0.1@112.191,92.467 cw(c113.084,91.574) 113.084,92.837 cw(c113.084,94.1) D2-0.1@112.191,93.207 ; 114.648,92.837 cw(c114.648,90.899) P-R0.2@116.018,92.269 ; P-R0.2@116.018,93.151 cw(c115.262,93.907) 115.262,92.837 cw(c115.262,91.513) P-R0.2@116.198,92.449
NetD2-1_1: D2-1.1 P-R1.2 | length 10.1
  Top Layer w0.254: D2-1.1@74.61,92.583 P-R1.2@78.994,92.583 ; D2-1.1@74.98,92.213 cw(c75.873,91.32) 75.873,92.583 cw(c75.873,93.846) D2-1.1@74.98,92.953 ; P-R1.2@78.553,92.142 ccw(c77.49,91.079) 77.49,92.583 ccw(c77.49,94.087) P-R1.2@78.553,93.024 ; P-R1.2@78.733,92.322 ccw(c78.103,91.692) 78.103,92.583 ccw(c78.103,93.474) P-R1.2@78.733,92.844
NetD2-2_1: D2-2.1 P-R2.3 | length 10.1
  Top Layer w0.254: D2-2.1@112.268,54.61 P-R2.3@116.586,54.61 ; D2-2.1@112.638,54.24 cw(c113.531,53.347) 113.531,54.61 cw(c113.531,55.873) D2-2.1@112.638,54.98 ; P-R2.3@116.145,54.169 ccw(c115.082,53.106) 115.082,54.61 ccw(c115.082,56.114) P-R2.3@116.145,55.051 ; P-R2.3@116.325,54.349 ccw(c115.695,53.719) 115.695,54.61 ccw(c115.695,55.501) P-R2.3@116.325,54.871
NetD2-3_1: D2-3.1 P-R3.2 | length 10.8
  Top Layer w0.254: D2-3.1@74.61,67.437 74.737,67.31 P-R3.2@78.994,67.31 ; D2-3.1@74.8,67.527 ccw(c75.325,68.052) 75.325,67.31 ; D2-3.1@74.98,66.967 cw(c75.807,66.14) 75.807,67.31 ; D2-3.1@74.98,67.707 ccw(c75.938,68.665) 75.938,67.31 ; P-R3.2@78.553,66.869 ccw(c77.49,65.806) 77.49,67.31 ccw(c77.49,68.814) P-R3.2@78.553,67.751 ; P-R3.2@78.733,67.049 ccw(c78.103,66.419) 78.103,67.31 ccw(c78.103,68.201) P-R3.2@78.733,67.571
NetD3-0_1: D3-0.1 P-R0.3 | length 10.1
  Top Layer w0.254: D3-0.1@111.821,90.297 116.332,90.297 P-R0.3@116.459,90.17 ; D3-0.1@112.191,89.927 cw(c113.084,89.034) 113.084,90.297 cw(c113.084,91.56) D3-0.1@112.191,90.667 ; 114.648,90.297 cw(c114.648,88.359) P-R0.3@116.018,89.729 ; P-R0.3@116.018,90.611 cw(c115.262,91.367) 115.262,90.297 cw(c115.262,88.973) P-R0.3@116.198,89.909
NetD3-1_1: D3-1.1 P-R1.3 | length 10.1
  Top Layer w0.254: D3-1.1@74.61,90.043 P-R1.3@78.994,90.043 ; D3-1.1@74.98,89.673 cw(c75.873,88.78) 75.873,90.043 cw(c75.873,91.306) D3-1.1@74.98,90.413 ; P-R1.3@78.553,89.602 ccw(c77.49,88.539) 77.49,90.043 ccw(c77.49,91.547) P-R1.3@78.553,90.484 ; P-R1.3@78.733,89.782 ccw(c78.103,89.152) 78.103,90.043 ccw(c78.103,90.934) P-R1.3@78.733,90.304
NetD3-2_1: D3-2.1 P-R2.4 | length 10.1
  Top Layer w0.254: D3-2.1@112.268,57.15 P-R2.4@116.586,57.15 ; D3-2.1@112.638,56.78 cw(c113.531,55.887) 113.531,57.15 cw(c113.531,58.413) D3-2.1@112.638,57.52 ; P-R2.4@116.145,56.709 ccw(c115.082,55.646) 115.082,57.15 ccw(c115.082,58.654) P-R2.4@116.145,57.591 ; P-R2.4@116.325,56.889 ccw(c115.695,56.259) 115.695,57.15 ccw(c115.695,58.041) P-R2.4@116.325,57.411
NetD3-3_1: D3-3.1 P-R3.3 | length 10.8
  Top Layer w0.254: D3-3.1@74.61,64.897 74.737,64.77 P-R3.3@78.994,64.77 ; D3-3.1@74.8,64.987 ccw(c75.325,65.512) 75.325,64.77 ; D3-3.1@74.98,64.427 cw(c75.807,63.6) 75.807,64.77 ; D3-3.1@74.98,65.167 ccw(c75.938,66.125) 75.938,64.77 ; P-R3.3@78.553,64.329 ccw(c77.49,63.266) 77.49,64.77 ccw(c77.49,66.274) P-R3.3@78.553,65.211 ; P-R3.3@78.733,64.509 ccw(c78.103,63.879) 78.103,64.77 ccw(c78.103,65.661) P-R3.3@78.733,65.031
NetD4-0_1: D4-0.1 P-R0.4 | length 10.4
  Top Layer w0.254: D4-0.1@111.821,87.63 P-R0.4@116.459,87.63 ; D4-0.1@112.191,87.26 cw(c113.084,86.367) 113.084,87.63 cw(c113.084,88.893) D4-0.1@112.191,88 ; P-R0.4@116.018,87.189 ccw(c114.955,86.126) 114.955,87.63 ccw(c114.955,89.134) P-R0.4@116.018,88.071 ; P-R0.4@116.198,87.369 ccw(c115.568,86.739) 115.568,87.63 ccw(c115.568,88.521) P-R0.4@116.198,87.891
NetD4-1_1: D4-1.1 P-R1.4 | length 10.1
  Top Layer w0.254: D4-1.1@74.61,87.503 P-R1.4@78.994,87.503 ; D4-1.1@74.98,87.133 cw(c75.873,86.24) 75.873,87.503 cw(c75.873,88.766) D4-1.1@74.98,87.873 ; P-R1.4@78.553,87.062 ccw(c77.49,85.999) 77.49,87.503 ccw(c77.49,89.007) P-R1.4@78.553,87.944 ; P-R1.4@78.733,87.242 ccw(c78.103,86.612) 78.103,87.503 ccw(c78.103,88.394) P-R1.4@78.733,87.764
NetD4-2_1: D4-2.1 P-R2.5 | length 10.1
  Top Layer w0.254: D4-2.1@112.268,59.69 P-R2.5@116.586,59.69 ; D4-2.1@112.638,59.32 cw(c113.531,58.427) 113.531,59.69 cw(c113.531,60.953) D4-2.1@112.638,60.06 ; P-R2.5@116.145,59.249 ccw(c115.082,58.186) 115.082,59.69 ccw(c115.082,61.194) P-R2.5@116.145,60.131 ; P-R2.5@116.325,59.429 ccw(c115.695,58.799) 115.695,59.69 ccw(c115.695,60.581) P-R2.5@116.325,59.951
NetD4-3_1: D4-3.1 P-R3.4 | length 10.8
  Top Layer w0.254: D4-3.1@74.61,62.357 74.737,62.23 P-R3.4@78.994,62.23 ; D4-3.1@74.8,62.447 ccw(c75.325,62.972) 75.325,62.23 ; D4-3.1@74.98,61.887 cw(c75.807,61.06) 75.807,62.23 ; D4-3.1@74.98,62.627 ccw(c75.938,63.585) 75.938,62.23 ; P-R3.4@78.553,61.789 ccw(c77.49,60.726) 77.49,62.23 ccw(c77.49,63.734) P-R3.4@78.553,62.671 ; P-R3.4@78.733,61.969 ccw(c78.103,61.339) 78.103,62.23 ccw(c78.103,63.121) P-R3.4@78.733,62.491
NetD5-0_1: D5-0.1 P-R0.5 | length 10.4
  Top Layer w0.254: D5-0.1@111.821,85.09 P-R0.5@116.459,85.09 ; D5-0.1@112.191,84.72 cw(c113.084,83.827) 113.084,85.09 cw(c113.084,86.353) D5-0.1@112.191,85.46 ; P-R0.5@116.018,84.649 ccw(c114.955,83.586) 114.955,85.09 ccw(c114.955,86.594) P-R0.5@116.018,85.531 ; P-R0.5@116.198,84.829 ccw(c115.568,84.199) 115.568,85.09 ccw(c115.568,85.981) P-R0.5@116.198,85.351
NetD5-1_1: D5-1.1 P-R1.5 | length 10.9
  Top Layer w0.254: D5-1.1@74.61,85.471 75.118,84.963 P-R1.5@78.994,84.963 ; D5-1.1@74.8,84.746 cw(c75.325,84.221) 75.325,84.963 ; D5-1.1@74.98,84.566 cw(c75.938,83.608) 75.938,84.963 ; D5-1.1@74.98,85.306 ccw(c75.807,86.133) 75.807,84.963 ; P-R1.5@78.553,84.522 ccw(c77.49,83.459) 77.49,84.963 ccw(c77.49,86.467) P-R1.5@78.553,85.404 ; P-R1.5@78.733,84.702 ccw(c78.103,84.072) 78.103,84.963 ccw(c78.103,85.854) P-R1.5@78.733,85.224
NetD5-2_1: D5-2.1 P-R2.6 | length 10.1
  Top Layer w0.254: D5-2.1@112.268,62.23 P-R2.6@116.586,62.23 ; D5-2.1@112.638,61.86 cw(c113.531,60.967) 113.531,62.23 cw(c113.531,63.493) D5-2.1@112.638,62.6 ; P-R2.6@116.145,61.789 ccw(c115.082,60.726) 115.082,62.23 ccw(c115.082,63.734) P-R2.6@116.145,62.671 ; P-R2.6@116.325,61.969 ccw(c115.695,61.339) 115.695,62.23 ccw(c115.695,63.121) P-R2.6@116.325,62.491
NetD5-3_1: D5-3.1 P-R3.5 | length 10.8
  Top Layer w0.254: D5-3.1@74.61,59.817 74.737,59.69 P-R3.5@78.994,59.69 ; D5-3.1@74.8,59.907 ccw(c75.325,60.432) 75.325,59.69 ; D5-3.1@74.98,59.347 cw(c75.807,58.52) 75.807,59.69 ; D5-3.1@74.98,60.087 ccw(c75.938,61.045) 75.938,59.69 ; P-R3.5@78.553,59.249 ccw(c77.49,58.186) 77.49,59.69 ccw(c77.49,61.194) P-R3.5@78.553,60.131 ; P-R3.5@78.733,59.429 ccw(c78.103,58.799) 78.103,59.69 ccw(c78.103,60.581) P-R3.5@78.733,59.951
NetD6-0_1: D6-0.1 P-R0.6 | length 10.4
  Top Layer w0.254: D6-0.1@111.821,82.55 P-R0.6@116.459,82.55 ; D6-0.1@112.191,82.18 cw(c113.084,81.287) 113.084,82.55 cw(c113.084,83.813) D6-0.1@112.191,82.92 ; P-R0.6@116.018,82.109 ccw(c114.955,81.046) 114.955,82.55 ccw(c114.955,84.054) P-R0.6@116.018,82.991 ; P-R0.6@116.198,82.289 ccw(c115.568,81.659) 115.568,82.55 ccw(c115.568,83.441) P-R0.6@116.198,82.811
NetD6-1_1: D6-1.1 P-R1.6 | length 10.5
  Top Layer w0.254: D6-1.1@74.8,82.206 cw(c75.325,81.681) 75.325,82.423 ; D6-1.1@74.803,82.423 P-R1.6@78.994,82.423 ; D6-1.1@74.98,82.026 cw(c75.938,81.068) 75.938,82.423 ; D6-1.1@74.98,82.766 ccw(c75.807,83.593) 75.807,82.423 ; P-R1.6@78.553,81.982 ccw(c77.49,80.919) 77.49,82.423 ccw(c77.49,83.927) P-R1.6@78.553,82.864 ; P-R1.6@78.733,82.162 ccw(c78.103,81.532) 78.103,82.423 ccw(c78.103,83.314) P-R1.6@78.733,82.684
NetD6-2_1: D6-2.1 P-R2.7 | length 10.1
  Top Layer w0.254: D6-2.1@112.268,64.77 P-R2.7@116.586,64.77 ; D6-2.1@112.638,64.4 cw(c113.531,63.507) 113.531,64.77 cw(c113.531,66.033) D6-2.1@112.638,65.14 ; P-R2.7@116.145,64.329 ccw(c115.082,63.266) 115.082,64.77 ccw(c115.082,66.274) P-R2.7@116.145,65.211 ; P-R2.7@116.325,64.509 ccw(c115.695,63.879) 115.695,64.77 ccw(c115.695,65.661) P-R2.7@116.325,65.031
NetD6-3_1: D6-3.1 P-R3.6 | length 10.8
  Top Layer w0.254: D6-3.1@74.61,57.277 74.737,57.15 P-R3.6@78.994,57.15 ; D6-3.1@74.8,57.367 ccw(c75.325,57.892) 75.325,57.15 ; D6-3.1@74.98,56.807 cw(c75.807,55.98) 75.807,57.15 ; D6-3.1@74.98,57.547 ccw(c75.938,58.505) 75.938,57.15 ; P-R3.6@78.553,56.709 ccw(c77.49,55.646) 77.49,57.15 ccw(c77.49,58.654) P-R3.6@78.553,57.591 ; P-R3.6@78.733,56.889 ccw(c78.103,56.259) 78.103,57.15 ccw(c78.103,58.041) P-R3.6@78.733,57.411
NetD7-0_1: D7-0.1 P-R0.7 | length 10.4
  Top Layer w0.254: D7-0.1@111.821,80.01 P-R0.7@116.459,80.01 ; D7-0.1@112.191,79.64 cw(c113.084,78.747) 113.084,80.01 cw(c113.084,81.273) D7-0.1@112.191,80.38 ; P-R0.7@116.018,79.569 ccw(c114.955,78.506) 114.955,80.01 ccw(c114.955,81.514) P-R0.7@116.018,80.451 ; P-R0.7@116.198,79.749 ccw(c115.568,79.119) 115.568,80.01 ccw(c115.568,80.901) P-R0.7@116.198,80.271
NetD7-1_1: D7-1.1 P-R1.7 | length 10.9
  Top Layer w0.254: D7-1.1@74.549,80.137 74.803,79.883 P-R1.7@78.994,79.883 ; D7-1.1@74.8,79.666 cw(c75.325,79.141) 75.325,79.883 ; D7-1.1@74.98,79.486 cw(c75.938,78.528) 75.938,79.883 ; D7-1.1@74.98,80.226 ccw(c75.807,81.053) 75.807,79.883 ; P-R1.7@78.553,79.442 ccw(c77.49,78.379) 77.49,79.883 ccw(c77.49,81.387) P-R1.7@78.553,80.324 ; P-R1.7@78.733,79.622 ccw(c78.103,78.992) 78.103,79.883 ccw(c78.103,80.774) P-R1.7@78.733,80.144
NetD7-2_1: D7-2.1 P-R2.8 | length 10.1
  Top Layer w0.254: D7-2.1@112.268,67.31 P-R2.8@116.586,67.31 ; D7-2.1@112.638,66.94 cw(c113.531,66.047) 113.531,67.31 cw(c113.531,68.573) D7-2.1@112.638,67.68 ; P-R2.8@116.145,66.869 ccw(c115.082,65.806) 115.082,67.31 ccw(c115.082,68.814) P-R2.8@116.145,67.751 ; P-R2.8@116.325,67.049 ccw(c115.695,66.419) 115.695,67.31 ccw(c115.695,68.201) P-R2.8@116.325,67.571
NetD7-3_1: D7-3.1 P-R3.7 | length 10.8
  Top Layer w0.254: D7-3.1@74.61,54.737 74.737,54.61 P-R3.7@78.994,54.61 ; D7-3.1@74.8,54.827 ccw(c75.325,55.352) 75.325,54.61 ; D7-3.1@74.98,54.267 cw(c75.807,53.44) 75.807,54.61 ; D7-3.1@74.98,55.007 ccw(c75.938,55.965) 75.938,54.61 ; P-R3.7@78.553,54.169 ccw(c77.49,53.106) 77.49,54.61 ccw(c77.49,56.114) P-R3.7@78.553,55.051 ; P-R3.7@78.733,54.349 ccw(c78.103,53.719) 78.103,54.61 ccw(c78.103,55.501) P-R3.7@78.733,54.871
NetD8-0_1: D8-0.1 P-R0.8 | length 10.4
  Top Layer w0.254: D8-0.1@111.821,77.47 P-R0.8@116.459,77.47 ; D8-0.1@112.191,77.1 cw(c113.084,76.207) 113.084,77.47 cw(c113.084,78.733) D8-0.1@112.191,77.84 ; P-R0.8@116.018,77.029 ccw(c114.955,75.966) 114.955,77.47 ccw(c114.955,78.974) P-R0.8@116.018,77.911 ; P-R0.8@116.198,77.209 ccw(c115.568,76.579) 115.568,77.47 ccw(c115.568,78.361) P-R0.8@116.198,77.731
NetD8-1_1: D8-1.1 P-R1.8 | length 10.9
  Top Layer w0.254: D8-1.1@74.61,77.851 75.118,77.343 P-R1.8@78.994,77.343 ; D8-1.1@74.8,77.126 cw(c75.325,76.601) 75.325,77.343 ; D8-1.1@74.98,76.946 cw(c75.938,75.988) 75.938,77.343 ; D8-1.1@74.98,77.686 ccw(c75.807,78.513) 75.807,77.343 ; P-R1.8@78.553,76.902 ccw(c77.49,75.839) 77.49,77.343 ccw(c77.49,78.847) P-R1.8@78.553,77.784 ; P-R1.8@78.733,77.082 ccw(c78.103,76.452) 78.103,77.343 ccw(c78.103,78.234) P-R1.8@78.733,77.604
NetD8-2_1: D8-2.1 P-R2.9 | length 10.1
  Top Layer w0.254: D8-2.1@112.268,69.85 P-R2.9@116.586,69.85 ; D8-2.1@112.638,69.48 cw(c113.531,68.587) 113.531,69.85 cw(c113.531,71.113) D8-2.1@112.638,70.22 ; P-R2.9@116.145,69.409 ccw(c115.082,68.346) 115.082,69.85 ccw(c115.082,71.354) P-R2.9@116.145,70.291 ; P-R2.9@116.325,69.589 ccw(c115.695,68.959) 115.695,69.85 ccw(c115.695,70.741) P-R2.9@116.325,70.111
NetD8-3_1: D8-3.1 P-R3.8 | length 10.8
  Top Layer w0.254: D8-3.1@74.61,52.197 74.737,52.07 P-R3.8@78.994,52.07 ; D8-3.1@74.8,52.287 ccw(c75.325,52.812) 75.325,52.07 ; D8-3.1@74.98,51.727 cw(c75.807,50.9) 75.807,52.07 ; D8-3.1@74.98,52.467 ccw(c75.938,53.425) 75.938,52.07 ; P-R3.8@78.553,51.629 ccw(c77.49,50.566) 77.49,52.07 ccw(c77.49,53.574) P-R3.8@78.553,52.511 ; P-R3.8@78.733,51.809 ccw(c78.103,51.179) 78.103,52.07 ccw(c78.103,52.961) P-R3.8@78.733,52.331
NetDS1_8: DS1.3 DS1.8 Q1.3 | length 43.4
  Top Layer w0.254: DS1.3@110.492,101.114 cw(c110.104,100.484) 110.844,100.484 ; DS1.3@110.844,101.688 110.844,100.484 ; DS1.3@111.196,101.114 ccw(c111.584,100.484) 110.844,100.484 ; Q1.3@121.14,94.363 ccw(c120.631,94.872) 121.351,94.872 ccw(c122.07,94.872) Q1.3@121.562,94.363 ; Q1.3@121.351,93.927 121.351,98.994 120.523,99.822 111.506,99.822 110.844,100.484
  Bottom Layer w0.254: DS1.3@110.368,102.163 ccw(c109.219,103.312) 110.844,103.312 ccw(c112.469,103.312) DS1.3@111.32,102.163 ; DS1.8@110.368,116.412 cw(c109.219,115.263) 110.844,115.263 cw(c112.469,115.263) DS1.8@111.32,116.412 ; DS1.3@110.548,101.984 ccw(c109.832,102.699) 110.844,102.699 ccw(c111.856,102.699) DS1.3@111.14,101.984 ; DS1.8@110.548,116.591 cw(c109.832,115.876) 110.844,115.876 cw(c111.856,115.876) DS1.8@111.14,116.591 ; DS1.3@110.744,101.854 110.844,101.954 DS1.8@110.844,116.888
NetDS2_8: DS2.3 DS2.8 Q2.3 | length 34
  Top Layer w0.254: DS2.3@123.448,100.926 cw(c123.338,100.611) 123.671,100.611 ; DS2.3@123.671,101.561 123.671,100.611 ; DS2.3@123.894,100.926 ccw(c124.004,100.611) 123.671,100.611 ; Q2.3@125.331,94.363 ccw(c124.822,94.872) 125.542,94.872 ccw(c126.261,94.872) Q2.3@125.753,94.363 ; Q2.3@125.542,93.927 125.542,98.74 123.671,100.611
  Bottom Layer w0.254: DS2.3@123.195,102.036 ccw(c122.046,103.185) 123.671,103.185 ccw(c125.296,103.185) DS2.3@124.147,102.036 ; DS2.8@123.195,116.285 cw(c122.046,115.136) 123.671,115.136 cw(c125.296,115.136) DS2.8@124.147,116.285 ; DS2.3@123.375,101.857 ccw(c122.659,102.572) 123.671,102.572 ccw(c124.683,102.572) DS2.3@123.967,101.857 ; DS2.8@123.375,116.464 cw(c122.659,115.749) 123.671,115.749 cw(c124.683,115.749) DS2.8@123.967,116.464 ; DS2.3@123.571,101.854 DS2.3@123.671,101.954 ; DS2.3@123.671,101.561 DS2.8@123.671,116.761
NetDS3_8: DS3.3 DS3.8 Q3.3 | length 55.8
  Top Layer w0.254: Q3.3@129.649,94.363 ccw(c129.14,94.872) 129.86,94.872 ccw(c130.579,94.872) Q3.3@130.071,94.363 ; Q3.3@129.86,93.927 129.86,98.105 129.159,98.806 126.619,98.806 124.968,100.457 124.968,102.997 125.857,103.886 130.702,103.886 131.083,103.505 131.953,103.505 132.461,104.013 136.144,104.013 136.498,103.659 DS3.3@136.498,101.561 ; DS3.3@136.022,102.036 ccw(c134.873,103.185) 136.498,103.185 ccw(c138.123,103.185) DS3.3@136.974,102.036 ; DS3.3@136.202,101.857 ccw(c135.486,102.572) 136.498,102.572 ccw(c137.51,102.572) DS3.3@136.794,101.857
  Bottom Layer w0.254: DS3.3@136.022,102.036 ccw(c134.873,103.185) 136.498,103.185 ccw(c138.123,103.185) DS3.3@136.974,102.036 ; DS3.8@136.022,116.285 cw(c134.873,115.136) 136.498,115.136 cw(c138.123,115.136) DS3.8@136.974,116.285 ; DS3.3@136.202,101.857 ccw(c135.486,102.572) 136.498,102.572 ccw(c137.51,102.572) DS3.3@136.794,101.857 ; DS3.8@136.202,116.464 cw(c135.486,115.749) 136.498,115.749 cw(c137.51,115.749) DS3.8@136.794,116.464 ; DS3.3@136.498,101.561 DS3.8@136.498,116.761
NetDS4_8: DS4.3 DS4.8 Q4.3 | length 90.4
  Top Layer w0.254: v1@127.022,102.511 cw(c126.155,101.644) 127.381,101.644 cw(c128.607,101.644) v1@127.74,102.511 ; v1(127.381,102.87) 127.381,100.457 127.889,99.949 133.35,99.949 134.178,99.121 Q4.3@134.178,93.927 ; Q4.3@133.967,94.363 ccw(c133.458,94.872) 134.178,94.872 ccw(c134.897,94.872) Q4.3@134.389,94.363
  Bottom Layer w0.254: v1@127.022,103.229 ccw(c125.848,104.403) 127.508,104.403 ; v1@127.201,103.05 ccw(c126.461,103.79) 127.508,103.79 ccw(c128.301,103.79) v1@127.74,103.229 ; v1(127.381,102.87) 127.508,102.997 127.508,108.712 126.365,109.855 125.349,109.855 124.841,110.363 124.841,115.062 124.968,115.189 124.968,117.856 125.349,118.237 147.976,118.237 DS4.8@149.452,116.761 DS4.3@149.452,101.561 ; DS4.8@148.779,116.761 ccw(c147.154,116.761) 148.303,117.909 ccw(c149.452,119.058) DS4.8@149.452,117.434 ; DS4.3@148.976,102.036 ccw(c147.827,103.185) 149.452,103.185 ccw(c151.077,103.185) DS4.3@149.928,102.036 ; DS4.8@148.976,116.285 cw(c147.827,115.136) 149.452,115.136 cw(c151.077,115.136) DS4.8@149.928,116.285 ; DS4.8@149.033,116.761 ccw(c148.021,116.761) 148.737,117.476 ccw(c149.452,118.191) DS4.8@149.452,117.18 ; DS4.3@149.156,101.857 ccw(c148.44,102.572) 149.452,102.572 ccw(c150.464,102.572) DS4.3@149.748,101.857 ; DS4.8@149.156,116.464 cw(c148.44,115.749) 149.452,115.749 cw(c150.464,115.749) DS4.8@149.748,116.464
NetJ1_1: ?.1 KEY.1 USB.1 | length 50.2
  Top Layer w0.254: ?.1@51.358,108.137 cw(c50.604,107.188) 51.816,107.188 ; ?.1@51.517,108.336 cw(c51.023,107.715) 51.816,107.715 cw(c52.609,107.715) ?.1@52.115,108.336 ; ?.1@51.816,108.712 51.816,107.188 ; ?.1@52.274,108.137 ccw(c53.028,107.188) 51.816,107.188 ; KEY.1@56.84,106.736 cw(c55.477,108.099) 55.477,106.172 cw(c55.477,104.245) 56.84,105.608 cw(c55.477,104.245) 57.404,104.245 cw(c59.331,104.245) KEY.1@57.968,105.608 ; KEY.1@57.019,106.557 cw(c56.091,107.485) 56.091,106.172 cw(c56.091,104.859) 57.019,105.787 cw(c56.091,104.859) 57.404,104.859 cw(c58.717,104.859) KEY.1@57.789,105.787 ; USB.1@77.26,105.734 cw(c76.111,104.585) 77.735,104.585 cw(c79.36,104.585) USB.1@78.211,105.734 ; USB.1@77.439,105.913 cw(c76.724,105.198) 77.735,105.198 cw(c78.747,105.198) USB.1@78.032,105.913 ; USB.1@77.735,106.209 77.735,104.278 77.089,103.632 57.912,103.632 57.404,104.14 KEY.1@57.404,106.172 52.832,106.172 51.816,107.188
NetJ1_2: ?.2 ?.3 KEY.4 USB.4 | length 59
  Top Layer w0.254: KEY.4@56.84,110.688 cw(c55.477,109.325) 57.404,109.325 cw(c59.331,109.325) KEY.4@57.968,110.688 ; KEY.4@57.019,110.867 cw(c56.091,109.939) 57.404,109.939 cw(c58.717,109.939) KEY.4@57.789,110.867 ; KEY.4@57.404,111.252 57.404,109.22 58.166,108.458 64.77,108.458 65.532,107.696 65.532,104.775 66.04,104.267 70.231,104.267 70.736,104.772 ; USB.4@70.304,105.693 cw(c69.536,104.772) 70.736,104.772 ; USB.4@70.467,105.888 cw(c69.989,105.314) 70.736,105.314 cw(c71.482,105.314) USB.4@71.004,105.888 ; USB.4@70.736,106.209 70.736,104.772 ; USB.4@71.167,105.693 ccw(c71.935,104.772) 70.736,104.772
  Bottom Layer w0.254: ?.3@46.736,108.712 46.355,108.331 46.355,108.077 46.736,107.696 ; ?.3@47.117,108.077 46.736,107.696 ; ?.2@48.756,106.692 ccw(c47.502,107.946) 49.276,107.946 ccw(c51.05,107.946) ?.2@49.796,106.692 ; ?.2@48.936,106.512 ccw(c48.115,107.333) 49.276,107.333 ccw(c50.437,107.333) ?.2@49.616,106.512 ; ?.2@49.022,106.172 48.768,105.918 48.514,105.918 48.26,106.172 48.514,106.426 49.022,106.426 ?.2@49.276,106.172 ; KEY.4@56.84,110.688 ccw(c55.477,109.325) 55.477,111.252 ccw(c55.477,113.179) KEY.4@56.84,111.816 ; KEY.4@57.019,110.867 ccw(c56.091,109.939) 56.091,111.252 ccw(c56.091,112.565) KEY.4@57.019,111.637 ; KEY.4@57.404,111.252 50.8,111.252 49.276,109.728 ?.2@49.276,106.172 ; 46.736,107.696 46.736,106.807 47.371,106.172 ?.2@49.276,106.172
NetJ1_3: 
NetJ61_2: J61.2 MAX232.14 | length 12.5
  Top Layer w0.254: J61.2@49.528,70.89 53.113,70.89 MAX232.14@54.36,72.137 ; J61.2@49.856,70.562 cw(c50.648,69.77) 50.648,70.89 cw(c50.648,72.01) J61.2@49.856,71.218 ; J61.2@50.036,70.382 cw(c51.261,69.157) 51.261,70.89 cw(c51.261,72.623) J61.2@50.036,71.398 ; 53.232,71.01 ccw(c52.105,72.137) MAX232.14@53.699,72.137 ; 53.624,71.402 cw(c54.197,70.829) MAX232.14@54.197,71.639 ; 53.666,71.443 ccw(c52.972,72.137) MAX232.14@53.953,72.137
NetJ61_3: J61.3 MAX232.13 | length 12.7
  Top Layer w0.254: J61.3@49.528,73.66 52.832,73.66 53.849,74.677 MAX232.13@54.36,74.677 ; J61.3@49.856,73.332 cw(c50.648,72.54) 50.648,73.66 cw(c50.648,74.78) J61.3@49.856,73.988 ; J61.3@50.036,73.152 cw(c51.261,71.927) 51.261,73.66 cw(c51.261,75.393) J61.3@50.036,74.168 ; 52.752,73.58 cw(c54.197,72.135) MAX232.13@54.197,74.179 ; 53.186,74.014 cw(c54.197,73.003) MAX232.13@54.197,74.433 ; 53.594,74.422 ccw(c53.338,74.677) MAX232.13@53.699,74.677
NetJP0_1: JP0.1 P-R0.9 | length 13
  Top Layer w0.254: JP0.1@111.841,74.595 cw(c112.651,73.785) 112.651,74.93 cw(c112.651,75.567) JP0.1@112.201,75.117 ; JP0.1@111.887,74.93 P-R0.9@116.459,74.93 ; JP0.1@112.021,74.415 cw(c113.264,73.172) 113.264,74.93 ; JP0.1@112.201,74.235 cw(c113.877,72.559) 113.877,74.93 ; P-R0.9@116.018,74.489 ccw(c114.955,73.426) 114.955,74.93 ccw(c114.955,76.434) P-R0.9@116.018,75.371 ; P-R0.9@116.198,74.669 ccw(c115.568,74.039) 115.568,74.93 ccw(c115.568,75.821) P-R0.9@116.198,75.191